# Altium PCB OLED-0.96-Demo-MCU+Board.PcbDoc (part 1 of 2)
Units mil, origin at the board's own origin, x right, y up, seen from the top; angles counter-clockwise.
Board outline 1090.03 x 3263.03 mil, 2 copper layers (Top Layer, Bottom Layer); 60 components, 61 nets, 262 pads, 120 vias.
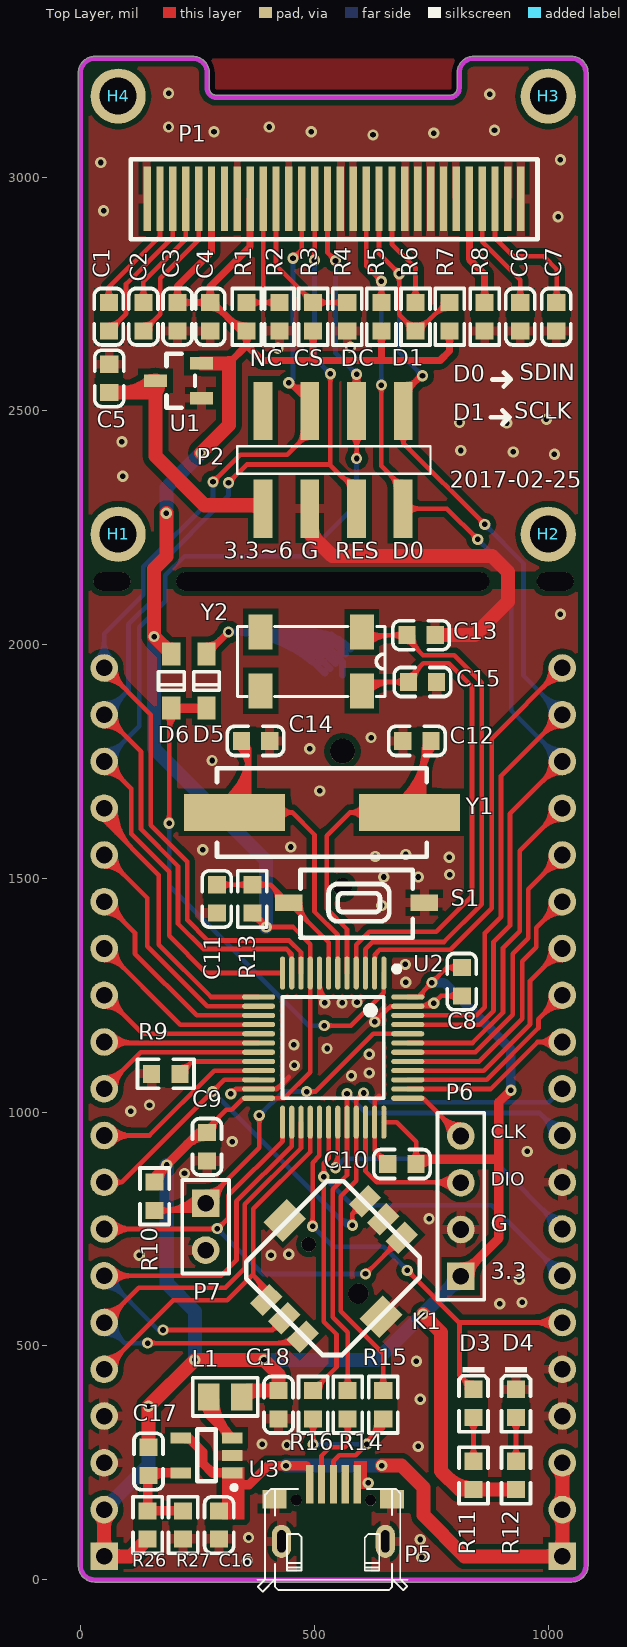
[diagram p0: Top Layer view]
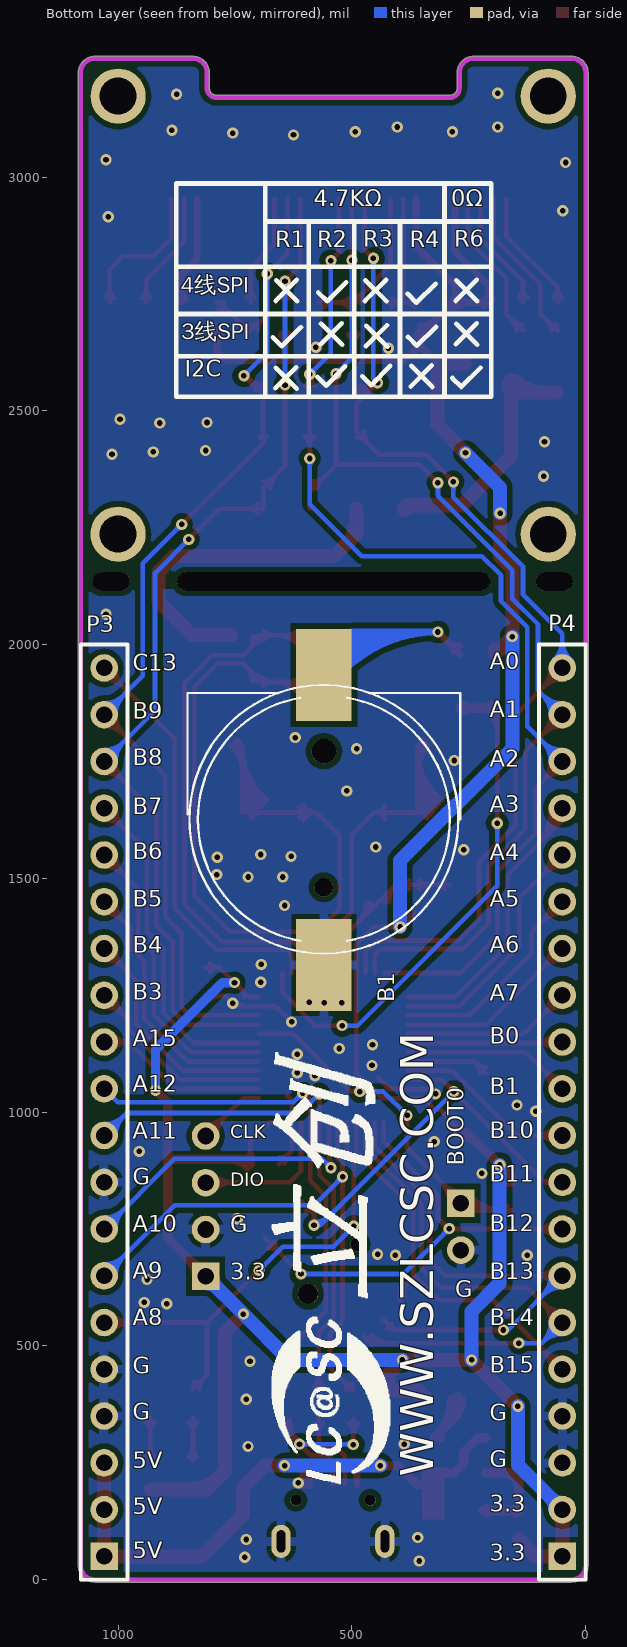
[diagram p1: Bottom Layer view, seen from below]
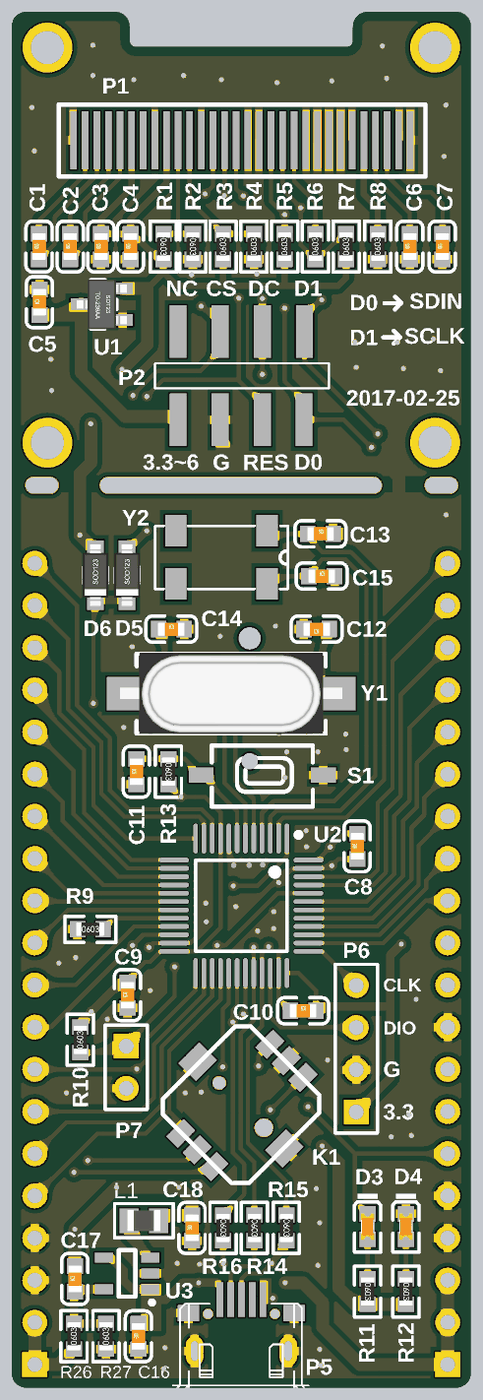
[diagram p3: 3D render of the assembled board from above, using the file's embedded part models]

## Layer stack, top to bottom
Top Solder: solder mask 0.4, Solder Resist, Dk 3.5
Top Layer: signal copper 1.4
Dielectric 1: dielectric 12.6, FR-4, Dk 4.8
Bottom Layer: signal copper 1.4
Bottom Solder: solder mask 0.4, Solder Resist, Dk 3.5

## Board outline
30,-5.02 cw(c30,30) -5.02,30 -5.02,3223 cw(c30,3223) 30,3258.01 240,3258.01 cw(c240,3223) 275.02,3223 275.02,3190 ccw(c290,3190) 290,3175.01 790,3175.01 ccw(c790,3190) 804.98,3190 804.98,3221.5 cw(c810,3221.5) 805.04,3222.25 cw(c810,3223) 804.98,3223 cw(c840,3223) 840,3258.01 1050,3258.01 cw(c1050,3223) 1085.02,3223 1085.02,30 cw(c1050,30) 1050,-5.02

## Design rules (kind name [scope] priority, off if disabled: settings)
Clearance Clearance_1 [InPolygon] p1: gap=12
Clearance [All] p2: gap=7
ComponentClearance [All] p1: gap=4 collisioncheckmode=3 verticalgap=4 showdistances=FALSE
DiffPairsRouting [All] p1: maxlimit=10 minlimit=10 mostfreqgap=10 toplayer_minwidth=10 toplayer_maxwidth=15 toplayer_prefwidth=15 bottomlayer_minwidth=10 bottomlayer_maxwidth=15 bottomlayer_prefwidth=15 maxuncoupledlength=500
HoleSize [All] p1: absolutevalues=TRUE maxlimit=500 minlimit=1 maxpercent=80.000 minpercent=20.000
HoleToHoleClearance [All] p1: gap=4 allowstackedmicrovias=TRUE
MinimumSolderMaskSliver [All] p1: minsoldermaskwidth=4
PolygonConnect PolygonConnect_1 [Isvia] p1: connectstyle=Direct reliefconductorwidth=10 reliefentries=4 polygonreliefangle="90 Angle" airgapwidth=10
PolygonConnect [All] p2: connectstyle=Relief reliefconductorwidth=20 reliefentries=4 polygonreliefangle="90 Angle" airgapwidth=10
RoutingVias [All] p1: holewidth=20 width=30 viastyle="Through Hole" minholewidth=10 minwidth=10 maxholewidth=28 maxwidth=50
SilkToSilkClearance [All] p1: silktosilkclearance=4
SilkToSolderMaskClearance [IsPad] p1: minsilkscreentomaskgap=0 clearancetoexposedcopper=TRUE
SolderMaskExpansion [All] p1: expansion=4
Width [All] p1: maxlimit=500 minlimit=10 preferedwidth=10 minimp=50.000000 maximp=50.000000 favimp=50.000000
22 further rules are at their usual default settings.

## Components (designator, comment, footprint, x,y, rotation, side; value= is the part's Value field where it differs from the comment)
B1 "BAT" "BATTERY SOCKET" 560,1625 r270 bottom
C1 "1μF" LC-0603_C 60.01,2701.2 r90 top
C2 "1μF" LC-0603_C 134.01,2701.2 r90 top
C3 "1μF" LC-0603_C 207.01,2701.2 r90 top
C4 "1μF" LC-0603_C 277.01,2701.2 r90 top
C5 "1μF" LC-0603_C 61.01,2569.2 r90 top
C6 "4.7μF" LC-0603_C 940.01,2701.2 r90 top
C7 "2.2μF" LC-0603_C 1017.01,2701.2 r90 top
C8 "0.1μF" LC-0603_C 815,1279 r90 top
C9 "0.1μF" LC-0603_C 270,926 r90 top
C10 "0.1μF" LC-0603_C 687,889 r0 top
C11 "0.1μF" LC-0603_C 291,1456 r90 top
C12 "20pF" LC-0603_C 719,1794 r180 top
C13 "6pF" LC-0603_C 728,2020 r0 top
C14 "20pF" LC-0603_C 374,1794 r0 top
C15 "6pF" LC-0603_C 731,1920 r0 top
C16 "10uF (106) 10% 10V" LC-0603_C 296,117 r90 top
C17 "22pF (220) 5% 50V" LC-0603_C 145,253 r90 top
C18 "10uF (106) 10% 10V" LC-0603_C 423,374 r90 top
D3 "POWER" LC-0603_LED_S1 840,377 r270 top
D4 "POWER" LC-0603_LED_S1 931,377 r270 top
D5 "MBR0520L" LC-SOD-123 269,1922 r90 top
D6 "MBR0520L" LC-SOD-123 194,1922 r90 top
H1 "Hole" Hole 80,2236 r0 top
H2 "Hole" Hole 1000.01,2236.2 r0 top
H3 "Hole" Hole 1000,3173 r180 top
H4 "Hole" Hole 80,3173 r180 top
K1 "KEY-5_MiNi" KEY_5_MINI 540,666 r45 top
L1 "2.2uH ±10%" LC-0805_L 309,391 r0 top
P1 "0.96OLED" OLED_0.96 142.01,2953.2 r180 top
P2 "Header 4X2" 2*4P_SMT 540.01,2395.2 r270 top
P3 "Header 20" HDR1X20 1030,50 r90 bottom
P4 "Header 20" HDR1X20 50,50 r90 bottom
P5 "Micro USB,母头" MicroUSB2 540,143 r0 top
P6 "下载接口" HDR1X4 813,649 r90 top
P7 "BOOT0" HDR1X2 267,805 r270 top
R1 "4.7KΩ/NC" LC-0603_R 355.01,2701.2 r270 top
R2 "4.7KΩ" LC-0603_R 425.01,2701.2 r270 top
R3 "4.7KΩ/NC" LC-0603_R 497.01,2701.2 r90 top
R4 "4.7KΩ" LC-0603_R 570.01,2701.2 r90 top
R5 "4.7KΩ" LC-0603_R 643.01,2701.2 r90 top
R6 "0Ω/NC" LC-0603_R 716.01,2701.2 r90 top
R7 "4.7KΩ" LC-0603_R 789.01,2701.2 r90 top
R8 "910KΩ" LC-0603_R 864.01,2701.2 r90 top
R9 "4.7KΩ" LC-0603_R 182,1082 r0 top
R10 "4.7KΩ" LC-0603_R 158,820 r90 top
R11 "1.5KΩ" LC-0603_R 840,223 r270 top
R12 "1.5KΩ" LC-0603_R 931,223 r270 top
R13 "4.7KΩ" LC-0603_R 367,1456 r270 top
R14 "100Ω" LC-0603_R 571,374 r270 top
R15 "100Ω" LC-0603_R 647,374 r270 top
R16 "1.5KΩ" LC-0603_R 497,374 r270 top
R26 "280KΩ (2803) ±1%" LC-0603_R 143,117 r90 top
R27 "62KΩ (6202) ±1%" LC-0603_R 219,117 r90 top
S1 "微动开关" 按键 590,1448 r180 top
U1 "SC662K-3.3" LC-SOT-23(SOT-23-3) 209.01,2564.2 r0 top
U2 "STM32F103C8T6" LC-LQFP-48_7x7x05P 540,1138 r180 top
U3 "BL8027" LC-SOT-23-5 269,266 r0 top
Y1 "8M" LC-HC-49SMD 516,1641 r180 top
Y2 "32768" MC-306 493,1964 r180 top

## Footprints (in the part's own frame and the unit in brackets; to place one, negate y for a bottom-side part, rotate by r counter-clockwise, add the part's x,y. Pads: shape width x height; smd on the part's side, far side on the other; paste and mask are expansions set on the pad)
2*4P_SMT [mm]
  rect 3.17x1.02 smd: 1(-2.654,3.81) 2(2.654,3.785) 3(-2.654,1.27) 4(2.654,1.27) 5(-2.654,-1.27) 6(2.654,-1.27) 7(-2.654,-3.81) 8(2.654,-3.81)
  silkscreen extent -0.74,-5.21 0.76,5.28
"BATTERY SOCKET" [mm]
  rect 5x3 smd: 1(-7.874,0) 2(7.874,0)
  round 1 hole 1 unplated: 3(3.664,0)
  round 1.35 hole 1.35 unplated: 4(-3.736,0)
  silkscreen extent -7.33,-7.41 7.26,7.41
HDR1X2 [mm] "Connector; Header; 2 Position"
  rect 1.5x1.5 hole 0.9: 1(0,0)
  round 1.5 hole 0.9: 2(2.54,0)
  silkscreen extent -1.27,-1.27 3.81,1.27
HDR1X4 [mm] "Connector; Header; 4 Position"
  rect 1.5x1.5 hole 0.9: 1(0,0)
  round 1.5 hole 0.9: 2(2.54,0) 3(5.08,0) 4(7.62,0)
  silkscreen extent -1.27,-1.27 8.89,1.27
HDR1X20 [mm] "Connector; Header; 20 Position"
  rect 1.5x1.5 hole 0.9: 1(0,0)
  round 1.5 hole 0.9: 2(2.54,0) 3(5.08,0) 4(7.62,0) 5(10.16,0) 6(12.7,0) 7(15.24,0) 8(17.78,0) 9(20.32,0) 10(22.86,0) 11(25.4,0) 12(27.94,0) 13(30.48,0) 14(33.02,0) 15(35.56,0) 16(38.1,0) 17(40.64,0) 18(43.18,0) 19(45.72,0) 20(48.26,0)
  silkscreen extent -1.27,-1.27 49.53,1.27
Hole [mm]
  round 3 hole 2: 0(0,0)
KEY_5_MINI [mm]
  rect 1.5x1 smd: 1(3.797,-1.461) 2(3.797,-0.038) 3(3.797,1.359) 4(-3.797,1.359) 5(-3.797,-0.038) 6(-3.797,-1.461)
  rect 1.8x1.5 smd: 7(-0.025,3.696) 8(-0.025,-3.696)
  round 0.8 hole 0.8: ""(-0.013,1.867)
  round 1.1 hole 1.1: ""(-0.013,-1.943)
  silkscreen extent -3.75,-3.67 3.75,3.59
LC-0603_C [mm]
  rect 0.93x0.98 smd: 1(-0.77,0) 2(0.77,0)
  silkscreen extent -1.53,-0.79 1.54,0.79, body extent -0.8,-0.4 0.8,0.4, height 0.3
LC-0603_LED_S1 [mm]
  rect 0.93x0.98 smd: A(0.77,0) K(-0.77,0)
  silkscreen extent -1.97,-0.79 1.54,0.79, body extent -0.8,-0.4 0.8,0.4, height 0.6
LC-0603_R [mm]
  rect 0.93x0.98 smd: 1(-0.77,0) 2(0.77,0)
  silkscreen extent -1.53,-0.79 1.54,0.79, body extent -0.85,-0.4 0.85,0.4, height 0.56
LC-0805_L [mm]
  rect 1.16x1.47 smd: 1(-0.89,0) 2(0.89,0)
  silkscreen extent -1.77,-1.04 1.77,1.03, body extent -1.02,-0.64 1.03,0.64, height 0.6
LC-HC-49SMD [mm]
  rect 5.5x2 smd: 1(-4.75,0) 2(4.75,0)
  silkscreen extent -5.7,-2.4 5.7,2.4, body extent -6.7,-2.46 6.7,2.44, height 4
LC-LQFP-48_7x7x05P [mm]
  oval 0.28x1.8 smd mask+0.051: 1(-2.75,-4.05) 2(-2.25,-4.05) 3(-1.75,-4.05) 4(-1.25,-4.05) 5(-0.75,-4.05) 6(-0.25,-4.05) 7(0.25,-4.05) 8(0.75,-4.05) 9(1.25,-4.05) 10(1.75,-4.05) 11(2.25,-4.05) 12(2.75,-4.05) 25(2.75,4.05) 26(2.25,4.05) 27(1.75,4.05) 28(1.25,4.05) 29(0.75,4.05) 30(0.25,4.05) 31(-0.25,4.05) 32(-0.75,4.05) 33(-1.25,4.05) 34(-1.75,4.05) 35(-2.25,4.05) 36(-2.75,4.05)
  oval 1.8x0.28 smd mask+0.051: 13(4.05,-2.75) 14(4.05,-2.25) 15(4.05,-1.75) 16(4.05,-1.25) 17(4.05,-0.75) 18(4.05,-0.25) 19(4.05,0.25) 20(4.05,0.75) 21(4.05,1.25) 22(4.05,1.75) 23(4.05,2.25) 24(4.05,2.75) 37(-4.05,2.75) 38(-4.05,2.25) 39(-4.05,1.75) 40(-4.05,1.25) 41(-4.05,0.75) 42(-4.05,0.25) 43(-4.05,-0.25) 44(-4.05,-0.75) 45(-4.05,-1.25) 46(-4.05,-1.75) 47(-4.05,-2.25) 48(-4.05,-2.75)
  silkscreen extent -3.6,-4.42 2.75,2.75
LC-SOD-123 [mm]
  rect 1.25x1 smd: 1(1.475,0) 2(-1.475,0)
  silkscreen extent -0.5,-0.7 0.5,0.7, body extent -1.85,-0.77 1.85,0.78, height 1.35
LC-SOT-23(SOT-23-3) [mm]
  rect 1.25x0.7 smd: 1(1.25,-0.95) 2(1.25,0.95) 3(-1.25,0)
  silkscreen extent -0.65,-1.46 0.9,1.46, body extent -1.5,-1.5 1.5,1.5, height 1.3
LC-SOT-23-5 [mm]
  rect 1.1x0.6 smd: 1(1.4,-0.95) 2(1.4,0) 3(1.4,0.95) 4(-1.4,0.95) 5(-1.4,-0.95)
  silkscreen extent -0.5,-1.87 1.63,1.4
MC-306 [mm]
  rect 1.3x1.9 smd: 1(-2.75,-1.6) 2(2.75,-1.6) 3(2.75,1.6) 4(-2.75,1.6)
  silkscreen extent -4,-1.9 4,1.9
MicroUSB2 [mm] "Connector; USB1.1, Type A, Thru-Hole; 4 Position; Vertical"
  rect 1.3x1 smd: 0(-3.188,0.737) 0(3.188,0.737)
  oval 1.05x1.8 hole 0.45 slot 1.2 at 90 deg: 0(-2.807,-1.549) 0(2.832,-1.549)
  rect 0.4x2.1 smd: 1(-1.283,1.549) 2(-0.635,1.549) 3(0.013,1.549) 4(0.66,1.549) 5(1.308,1.549)
  round 0.6 hole 0.6: ""(-2.007,0.686) ""(2.032,0.686)
  silkscreen extent -4.13,-4.28 4.05,1.3
OLED_0.96 [mm]
  rect 0.4x3.5 smd: 1(0,0) 2(-0.7,0) 3(-1.4,0) 4(-2.1,0) 5(-2.8,0) 6(-3.5,0) 7(-4.2,0) 8(-4.9,0) 9(-5.6,0) 10(-6.3,0) 11(-7,0) 12(-7.7,0) 13(-8.4,0) 14(-9.1,0) 15(-9.8,0) 16(-10.5,0) 17(-11.2,0) 18(-11.9,0) 19(-12.6,0) 20(-13.3,0) 21(-14,0) 22(-14.7,0) 23(-15.4,0) 24(-16.1,0) 25(-16.8,0) 26(-17.5,0) 27(-18.2,0) 28(-18.9,0) 29(-19.6,0) 30(-20.3,0)
  silkscreen extent -21.21,-2.16 0.89,2.18
按键 [mm]
  rect 1.5x0.9 smd: 1(-3.683,0) 2(3.683,0)
  silkscreen extent -3.05,-1.78 3.05,1.91

## Part data
B1: "电池"
C1 C2 C3 C4 C5 C6 C7 C8 C9 C10 C11 C12 C13 C14 C15: library part Cap, "贴片电容"
C16 C18: library part "0603 10uF (106) 10% 10V", "贴片电容"
C17: library part "0402 22pF (220) 5% 50V", "贴片电容"
D3 D4: library part LED1, "发光二极管"
D5 D6: library part "Diode 18TQ045", "贴片肖特基二极管"
H1 H2 H3 H4: "螺丝孔"
K1: "贴片五向开关"
L1: library part "0805 2.2uH 10%", "贴片电感"
P1: "接口"
P2: "Header, 4-Pin, Dual row"
P3 P4: "Header, 20-Pin"
P5: library part microUSB, "接口"
P6: library part "Header 4", "Header, 4-Pin"
P7: library part "Header 2", "Header, 2-Pin"
R1 R2 R3 R4 R5 R6 R7 R8 R9 R10 R11 R12 R13 R14 R15 R16: library part 电阻, "贴片电阻"
R26 R27: library part "0805 62KΩ (6202) 1%", "贴片电阻"
U1: "IC"
U2: library part STM32F103CBT6, "IC"
U3: library part DC-DC, "IC"
Y1 Y2: library part XTAL_1, "晶振（直插）"

## Free pads (board coordinates)
  oval 78.74x39.37 hole 39.37 slot 78.74 at 0 deg paste+0: 0(67,2135) 0(1015,2135)
  oval 669.29x39.37 hole 39.37 slot 669.29 at 0 deg paste+0: 0(539,2135)

## Via types
v1: diameter 24, hole 12, Top Layer to Bottom Layer, tented both sides, 120 vias

## Nets (pads, with @x,y where several pads share a name; then routed paths per layer and width w, separated by ;. In a path a pad name is that pad's centre, name@x,y a point inside that pad or via, vN(x,y) a via of type N, cw(c..) or ccw(c..) an arc to the next point about the centre after c; other vN are vias at no path point)
+3.3V: C3.2 C4.2 C8.2 C9.2 C10.2 C17.2 C18.2 D6.1 L1.2 P1.6 P1.9 P4.1 P4.2 P6.1 R1.2 R3.1 R5.1 R7.1 R10.2 R11.2 R12.2 R13.2 R26.1 U1.2 U2.9 U2.24 U2.36 U2.48 | length 8821.9
  Top Layer w10: C9.2@270,956.31 270,964 311,1005 323,1005 347.73,1029.73 U2.24@380.55,1029.73 434.73,1029.73 490.79,1085.79 U2.9@490.79,1297.45 490.79,1359.21 454,1396 v1(396.68,1396) R13.2@367,1425.68 ; C9.2@270.98,969.62 ccw(c270.98,980.82) C9.2@278.9,972.9 ; C9.2@274.29,956.31 cw(c303.2,956.31) 282.76,976.76 ; C9.2@284.29,956.31 cw(c337.35,956.31) 299.83,993.83 ; R13.2@367.98,1412.38 cw(c367.98,1382.63) v1@389.02,1403.66 ; R13.2@377.59,1410.27 cw(c364.35,1387.34) v1@389.92,1394.19 ; R13.2@381.29,1425.68 ccw(c415.79,1425.68) v1@391.4,1401.29 ; R13.2@384.22,1413.71 ccw(c404.58,1425.47) v1@398.5,1402.76 ; 388.9,1405.62 cw(c379.98,1400.48) v1@389.92,1397.81 ; v1@389.68,1396 ccw(c372.79,1396) 384.74,1407.95 ccw(c396.68,1419.9) v1@396.68,1403 ; v1@401.63,1391.05 cw(c413.58,1379.1) 413.58,1396 cw(c413.58,1412.9) v1@401.63,1400.95 ; U2.36@648.27,978.55 675.45,978.55 717.31,936.69 C10.2@717.31,889 ; U2.48@699.45,1246.27 720.27,1246.27 v1(751,1277) 783.31,1309.31 ; C10.2@707.91,899.39 ccw(c685.19,922.11) 717.31,922.11 ccw(c749.44,922.11) C10.2@726.72,899.39 ; U2.48@729.88,1246.27 cw(c753.09,1246.27) 736.68,1262.68 ; v1@744,1277 cw(c727.1,1277) 739.05,1265.05 cw(c751,1253.1) v1@751,1270 ; v1@751,1284 ccw(c751,1300.9) 762.95,1288.95 ccw(c774.9,1277) v1@758,1277 ; C8.2@804.3,1300.22 ccw(c783.32,1280.56) 783.32,1309.31 ; C8.2@804.3,1318.41 cw(c783.32,1338.07) 783.32,1309.31 ; C8.2@815,1309.31 783.31,1309.31
  Top Layer w15: C3.2@199.37,2739.16 ccw(c180.92,2757.61) 207.01,2757.61 ccw(c233.1,2757.61) C3.2@214.66,2739.16 ; C3.2@215.64,2723.87 cw(c234.09,2705.42) 234.09,2731.52 cw(c234.09,2757.61) C3.2@215.64,2739.16 ; U1.2@252.01,2602.2 U1.2@258.23,2602.2 ; C4.2@268.39,2723.87 ccw(c249.94,2705.42) 249.94,2731.52 ccw(c249.94,2757.61) C4.2@268.39,2739.16 ; C4.2@269.37,2739.16 ccw(c250.92,2757.61) 277.01,2757.61 ccw(c303.1,2757.61) C4.2@284.66,2739.16 ; C4.2@278,2720.71 cw(c278,2683.27) 304.47,2709.74 ; P1.6@279.81,2953.2 279.81,2840 207.01,2767.2 C3.2@207.01,2731.52 C4.2@277.01,2731.52 ; C4.2@288.81,2731.52 ccw(c303.55,2731.52) C4.2@293.12,2721.09 ; 317.01,2602.2 355.01,2640.2 ; 317.31,2696.9 ccw(c354.03,2733.62) R1.2@354.03,2681.69 ; R1.2@347.37,2663.24 cw(c328.92,2644.79) 355.01,2644.79 cw(c381.1,2644.79) R1.2@362.66,2663.24 ; P1.9@362.49,2953.2 362.49,2851.67 277.01,2766.2 C4.2@277.01,2731.52 ; R3.1@489.37,2663.24 cw(c470.92,2644.79) 497.01,2644.79 cw(c523.1,2644.79) R3.1@504.66,2663.24 ; R3.1@497.01,2670.89 497.01,2609.01 496,2608 ; R5.1@635.37,2663.24 cw(c616.92,2644.79) 643.01,2644.79 cw(c669.1,2644.79) R5.1@650.66,2663.24 ; R5.1@643.01,2670.89 643.01,2608.99 644,2608 ; R7.1@781.37,2663.24 cw(c762.92,2644.79) 789.01,2644.79 cw(c815.1,2644.79) R7.1@796.66,2663.24 ; R7.1@789.01,2670.89 789.01,2628.01 769,2608 644,2608 ; C4.2@277.01,2731.52 282.7,2731.52 343.33,2670.88 R1.2@355.01,2670.88 355.01,2640.2 ; 355.01,2640.2 387.21,2608 496,2608 ; 496,2608 644,2608
  Top Layer w20: R10.2@158,850.32 158,861 v1(184,887) 253.31,956.31 C9.2@270,956.31 ; R10.2@167.29,850.32 cw(c215.52,850.32) v1@181.42,884.42 ; 228.03,931.03 cw(c269.02,890.05) C9.2@269.02,948.01 ; C10.2@717.31,889 727.31,899 894,899 ; C10.2@723.19,884.11 cw(c759.14,848.16) 759.14,899 ; P6.1@813,649 894,730 894,899 ; P6.1@813,668.53 ccw(c813,715.67) 846.34,682.34 ccw(c879.67,649) P6.1@832.53,649 ; v1(920,1047) 894,1021 894,899
  Top Layer w30: P4.1@39.73,60.27 ccw(c14.93,85.07) 50,85.07 ccw(c85.07,85.07) 60.27,60.27 ccw(c85.07,85.07) 85.07,50 ccw(c85.07,14.93) P4.1@60.27,39.73 ; P4.2@39.73,139.73 cw(c14.93,114.93) 50,114.93 cw(c85.07,114.93) P4.2@60.27,139.73 ; P4.2@50,150 P4.1@50,50 106.31,50 R26.1@143,86.69 ; C17.2@145,283.31 v1(145,371) v1(244,470) v1(392,470) 423,439 C18.2@423,404.31 357.35,404.31 L1.2@344.04,391 ; D6.1@177.6,1996.47 ccw(c194,2012.87) D6.1@194,1989.68 ; v1(183,2281) 183,2188 157,2162 v1(157,2017.07) D6.1@194,1980.07 ; v1(257,2410) 317.01,2470.01 317.01,2602.2 316.42,2601.6 U1.2@258.23,2601.6 ; L1.2@349.58,391.56 cw(c380.37,360.78) 380.37,404.31 ; v1(732,568) 771,529 771,232 810.32,192.68 R11.2@840,192.68 R12.2@931,192.68 ; 784.38,218.62 ccw(c839.02,273.27) R11.2@839.02,195.99
  Bottom Layer w20: v1(751,1277) 776.8,1277 920,1133.8 v1(920,1047)
  Bottom Layer w30: P4.2@50,150 145,245 v1(145,371) ; P4.2@50,164.53 ccw(c50,199.6) 74.8,174.8 ccw(c99.6,150) P4.2@64.53,150 ; v1(157,2017.07) 157,1778 396.68,1538.32 v1(396.68,1396) ; v1(183,2281) 183,2336 v1(257,2410) ; v1(184,887) 184,634 244,574 v1(244,470) ; v1(392,470) 634,470 v1(732,568) P6.1@813,649 ; P6.1@798.47,649 cw(c763.4,649) 788.2,624.2 cw(c813,599.4) P6.1@813,634.47
+3.3~6V: C5.1 P2.8 U1.3 | length 717.2
  Top Layer w30: C5.1@61.01,2538.89 158.92,2538.89 ; 90.81,2538.89 ccw(c90.81,2622.37) U1.3@149.84,2563.34 ; U1.3@158.88,2565 ccw(c173.79,2551.99) 159.8,2538 ; U1.3@159.8,2564.2 159.8,2539.77 ; U1.3@160.73,2565 cw(c146.69,2552.88) 159.8,2539.77 ; U1.3@160.78,2564.93 cw(c144.82,2552.98) 158.92,2538.89 ; 360.13,2298 cw(c360.13,2260.82) P2.8@386.42,2287.11 ; P2.8@390.01,2290.7 382.71,2298 265,2298 159.8,2403.2 159.8,2538 ; 158.92,2538.89 159.8,2539.77 ; 158.92,2538.89 159.8,2538
+5V: C16.2 P3.1 P3.2 P3.3 P5.1 U3.1 U3.4 | length 1578.7
  Top Layer w15: P5.1@483,243 489.5,236.5 P5.1@489.5,204
  Top Layer w20: U3.4@213.88,303.4 230.6,303.4 261,273 261,249 282,228 282.6,228.6 U3.1@324.12,228.6 ; U3.4@223.72,301.59 cw(c223.72,280.62) 238.55,295.45 ; 317,203 360,203 401,244 v1(439,244) 482,244 P5.1@483,243
  Top Layer w30: v1(644,244) 686,244 733,197 733,138 821,50 P3.1@1030,50 P3.2@1030,150 P3.3@1030,250 ; P3.1@1019.73,39.73 ccw(c994.93,14.93) 994.93,50 ccw(c994.93,85.07) 1019.73,60.27 ccw(c994.93,85.07) 1030,85.07 ccw(c1065.07,85.07) P3.1@1040.27,60.27 ; P3.2@1019.73,139.73 cw(c994.93,114.93) 1030,114.93 cw(c1065.07,114.93) P3.2@1040.27,139.73 ; P3.2@1019.73,160.27 ccw(c994.93,185.07) 1030,185.07 ccw(c1065.07,185.07) P3.2@1040.27,160.27 ; P3.3@1019.73,239.73 cw(c994.93,214.93) 1030,214.93 cw(c1065.07,214.93) P3.3@1040.27,239.73
  Bottom Layer w30: v1(439,244) v1(644,244)
BOOT0: P7.1 R10.1 U2.44 | length 1229.5
  Top Layer w10: R10.1@158,789.69 247.69,789.69 P7.1@263,805 ; R10.1@168.39,780.28 cw(c191.11,757.56) 191.11,789.69 cw(c191.11,821.81) R10.1@168.39,799.09 ; R10.1@170.81,789.69 ccw(c170.81,901.19) P7.1@249.66,822.34 ; 194.95,789.69 ccw(c194.95,877.05) P7.1@256.73,815.27 ; 219.1,789.69 ccw(c219.1,852.9) P7.1@263.8,808.2 ; P7.1@262.69,804.69 P7.1@263,805 ; P7.1@267,829.53 ccw(c267,879.09) 302.04,844.04 ; P7.1@281.53,805 cw(c326.26,805) 294.63,836.63 ; P7.1@291.53,805 cw(c360.4,805) 311.7,853.7 ; v1@377.05,988.05 cw(c365.1,976.1) 382,976.1 cw(c398.9,976.1) v1@386.95,988.05 ; v1(382,993) 382,924 P7.1@263,805 ; v1(483,1044) 502,1044 625.53,1167.53 U2.44@699.45,1167.53 ; v1@487.95,1039.05 cw(c499.9,1027.1) 499.9,1044 cw(c499.9,1060.9) v1@487.95,1048.95
  Bottom Layer w10: v1(382,993) 433,1044 v1(483,1044) ; v1@382,1000 ccw(c382,1016.9) 393.95,1004.95 ccw(c405.9,993) v1@389,993 ; v1@478.05,1039.05 ccw(c466.1,1027.1) 466.1,1044 ccw(c466.1,1060.9) v1@478.05,1048.95
DGND: B1.2 C3.1 C4.1 C5.2 C6.1 C7.1 C8.1 C9.1 C10.1 C11.1 C12.2 C13.2 C14.2 C15.2 C16.1 C18.1 D4.K K1.2 K1.7 K1.8 P1.1 P1.8 P1.12 P1.16 P1.17 P1.21 P1.22 P1.23 P1.24 P1.25 P1.29 P1.30 P2.6 P3.4 P3.5 P3.9 P4.3 P4.4 P5.0 P5.5 P6.2 P7.2 R2.2 R4.1 R8.1 R9.1 R27.1 S1.1 U1.1 U2.8 U2.23 U2.35 U2.47 U3.2 | length 1701.5
  Top Layer w10: v1(321,1039) 331.42,1049.42 ; v1@321.71,1045.96 ccw(c322.93,1057.9) 331.42,1049.42 ; v1@327.96,1039.71 cw(c339.9,1040.93) 331.42,1049.42 ; U2.23@410.47,1049.93 ccw(c410.47,1072.76) 426.62,1056.62 ; 445,1075 419.42,1049.42 U2.23@380.55,1049.42 331.42,1049.42 ; 510.47,1254.59 ccw(c542.59,1254.59) v1@519.88,1231.88 ; U2.8@510.47,1278.73 ccw(c566.73,1278.73) v1@526.95,1238.95 ; U2.8@510.47,1297.45 510.47,1245.53 ; v1@515,1234.18 ccw(c499.53,1234.58) 510.47,1245.53 ; v1@521.82,1241 cw(c521.42,1256.47) 510.47,1245.53 ; v1(522,1234) 510.47,1245.53 ; v1(629,1193) 662.58,1226.58 U2.47@699.45,1226.58 748.58,1226.58 770.69,1248.69 C8.1@815,1248.69 ; v1@629,1200 ccw(c629,1216.9) 640.95,1204.95 ccw(c652.9,1193) v1@636,1193 ; 632.29,913.4 ccw(c656.69,937.79) C10.1@656.69,903.29 ; 634.66,911.02 cw(c613.63,889.98) C10.1@643.38,889.98 ; 638,1035 628.58,1025.58 U2.35@628.58,978.55 628.58,917.1 C10.1@656.69,889 ; 656.8,1220.8 cw(c669.53,1208.07) U2.47@669.53,1226.07 ; U2.47@722.61,1226.58 ccw(c722.61,1265.39) v1@750.05,1237.95 ; v1@755,1240 ccw(c755,1256.9) 766.95,1244.95 ccw(c778.9,1233) v1@762,1233 ; C8.1@804.61,1239.28 ccw(c781.89,1216.56) 781.89,1248.69 ccw(c781.89,1280.81) C8.1@804.61,1258.09
  Top Layer w30: P2.6@490.01,2290.7 490.01,2236.99 538,2189 880,2189 914,2155 914,2092 842,2020 C13.2@758.31,2020 ; P2.6@495.09,2248.38 ccw(c534.86,2248.38) 506.74,2220.26
  other v1: 356,40 729,48 726,86 359,90 615,207 722,285 441,288 388,290 726,386 718,467 896,590 944,593 938,642 125,694 407,694 445,696 745,772 222,869 955,916 324,937 107,1002 147,1015 579,1078 617,1084 457,1100 617,1124 527,1136 456,1144 755,1233 559,1234 591,1235 695,1278 694,1316 644,1442 648,1503 722,1503 789,1508 788,1545 630,1547 695,1551 261,1561 449,1567 511,1687 281,1752 490,1777 621,1801 1026,2065 90,2360 1013,2407 925,2412 813,2415 88,2434 911,2474 810,2475 996,2482 422,2634 577,2636 1021,2915 49,2928 43,3031 1026,3037 625,3090 755,3094 285,3097 493,3097 885,3100 188,3107 403,3107 875,3177 188,3179
NetB1_1: B1.1 D5.1 | length 1516.9
  Top Layer w15: D5.1@269,1980.07 315.93,2027 v1(316,2027) ; D5.1@269,1997.18 ccw(c269,2038.48) 298.2,2009.27 ; D5.1@281.18,1984.99 cw(c298.72,1984.99) D5.1@286.32,1997.39
  Bottom Layer w15: 351.14,2027 cw(c351.14,1774.4) B1.1@533.6,1949.09 ; 386.27,2027 cw(c386.27,1808.04) B1.1@544.43,1959.46 ; 421.4,2027 cw(c421.4,1841.67) B1.1@555.27,1969.84 ; 456.52,2027 cw(c456.52,1875.3) B1.1@566.1,1980.21 ; 491.65,2027 cw(c491.65,1908.93) B1.1@576.93,1990.58 ; B1.1@509.33,1983.89 ccw(c461.82,1992.81) 496,2027 ; B1.1@510.68,2012.32 ccw(c530.79,2032.43) B1.1@543.57,2007.03 ; B1.1@522.76,1938.72 ccw(c316.01,1740.77) v1(316,2027) 496,2027 ; B1.1@536.83,2020.42 cw(c520.96,2051.96) 496,2027 ; B1.1@560,1935 560,1963 496,2027
NetC1_1: C1.1 P1.3 | length 389.6
  Top Layer w10: C1.1@60.01,2670.89 97.01,2707.89 97.01,2771.2 197.13,2871.32 P1.3@197.13,2953.2 ; C1.1@61,2684.19 ccw(c61,2713.94) 82.03,2692.91 ; C1.1@74.31,2670.89 cw(c108.81,2670.89) 84.41,2695.28
NetC1_2: C1.2 P1.2 | length 317.5
  Top Layer w10: C1.2@50.6,2740.92 ccw(c27.89,2763.64) 60.01,2763.64 ccw(c92.14,2763.64) C1.2@69.42,2740.92 ; C1.2@60.01,2731.52 60.01,2764.2 169.57,2873.76 P1.2@169.57,2953.2
NetC2_1: C2.1 P1.5 | length 381.8
  Top Layer w10: C2.1@134.01,2670.89 170.01,2706.89 170.01,2783.2 252.25,2865.44 P1.5@252.25,2953.2 ; C2.1@135,2684.19 ccw(c135,2713.94) 156.03,2692.91 ; C2.1@148.31,2670.89 cw(c182.81,2670.89) 158.41,2695.28
NetC2_2: C2.2 P1.4 | length 309.7
  Top Layer w10: C2.2@124.6,2740.92 ccw(c101.89,2763.64) 134.01,2763.64 ccw(c166.14,2763.64) C2.2@143.42,2740.92 ; C2.2@134.01,2731.52 134.01,2776.2 224.69,2866.88 P1.4@224.69,2953.2
NetC6_2: C6.2 P1.27 | length 305.9
  Top Layer w10: P1.27@858.55,2953.2 858.55,2861.66 940.01,2780.2 C6.2@940.01,2731.52 ; C6.2@930.6,2740.92 ccw(c907.89,2763.64) 940.01,2763.64 ccw(c972.14,2763.64) C6.2@949.42,2740.92
NetC7_2: C7.2 P1.28 | length 365.3
  Top Layer w10: P1.28@886.11,2953.2 886.11,2869.11 925.01,2830.2 990.01,2830.2 1018.01,2802.2 1018.01,2732.51 C7.2@1017.01,2731.52 ; C7.2@1008.59,2740.92 ccw(c985.83,2763.68) 1018.01,2763.68 ; 1018.01,2763.6 ccw(c1050.09,2763.6) C7.2@1027.41,2740.92
NetC17_1: C17.1 R26.2 R27.2 U3.5 | length 368.1
  Top Layer w20: R26.2@137.13,153.19 ccw(c122.94,167.37) 143,167.37 ccw(c163.06,167.37) R26.2@148.87,153.19 ; 143,200.18 cw(c166.52,200.18) C17.1@149.89,216.81 ; R26.2@149.86,141.44 cw(c164.04,127.26) 164.04,147.32 cw(c164.04,167.37) R26.2@149.86,153.19 ; C17.1@151.86,216.81 cw(c180.32,188.35) 180.32,228.6 ; R27.2@212.14,141.44 ccw(c197.96,127.26) 197.96,147.32 ccw(c197.96,167.37) R27.2@212.14,153.19 ; U3.5@213.88,228.6 150.91,228.6 C17.1@145,222.69 143,220.69 R26.2@143,147.32 R27.2@219,147.32
NetD3_A: D3.A R11.1 | length 194.3
  Top Layer w10: R11.1@830.59,262.72 ccw(c807.87,285.44) 840,285.44 ccw(c872.13,285.44) R11.1@849.41,262.72 ; D3.A@830.59,337.28 cw(c807.87,314.56) 840,314.56 cw(c872.13,314.56) D3.A@849.41,337.28 ; R11.1@840,253.31 D3.A@840,346.68
NetD4_A: D4.A R12.1 | length 194.3
  Top Layer w10: R12.1@921.59,262.72 ccw(c898.87,285.44) 931,285.44 ccw(c963.13,285.44) R12.1@940.41,262.72 ; D4.A@921.59,337.28 cw(c898.87,314.56) 931,314.56 cw(c963.13,314.56) D4.A@940.41,337.28 ; R12.1@931,253.31 D4.A@931,346.68
NetL1_1: L1.1 U3.3 | length 308.7
  Top Layer w20: L1.1@264.89,375.82 cw(c242.98,353.91) 273.96,353.91 cw(c304.95,353.91) L1.1@283.04,375.82 ; L1.1@266.8,384.9 ccw(c325.15,384.9) 283.89,343.63 ; L1.1@273.96,391 273.96,353.56 U3.3@324.12,303.4 ; L1.1@286.8,384.9 ccw(c393.44,384.9) U3.3@318.03,309.49 ; 304.22,323.3 cw(c284.33,303.4) U3.3@312.46,303.4
NetP1_10: P1.10 R1.1 R2.1 | length 392.6
  Top Layer w10: R1.1@355.01,2731.51 390.01,2731.51 R2.1@425.01,2731.51 ; R1.1@365.41,2722.11 cw(c388.12,2699.39) 388.12,2731.51 cw(c388.12,2763.64) R1.1@365.41,2740.92 ; 390.05,2731.55 P1.10@390.05,2953.2 ; R2.1@414.62,2722.11 ccw(c391.9,2699.39) 391.9,2731.51 ccw(c391.9,2763.64) R2.1@414.62,2740.92
NetP1_11: P1.11 R3.2 R4.2 | length 479
  Top Layer w10: P1.11@417.6,2953.2 417.6,2810.92 R3.2@497.01,2731.52 R4.2@570.01,2731.52 ; 472.62,2755.91 cw(c448.22,2731.52) R3.2@482.72,2731.52 ; 474.99,2753.54 ccw(c496.03,2774.57) R3.2@496.03,2744.82 ; R3.2@507.41,2722.11 cw(c530.12,2699.39) 530.12,2731.52 cw(c530.12,2763.64) R3.2@507.41,2740.92 ; R4.2@559.62,2722.11 ccw(c536.9,2699.39) 536.9,2731.52 ccw(c536.9,2763.64) R4.2@559.62,2740.92
NetP1_20: P1.20 R6.2 | length 293
  Top Layer w10: P1.20@665.64,2953.2 665.64,2856.58 716.01,2806.2 R6.2@716.01,2731.52 ; R6.2@706.6,2740.92 ccw(c683.89,2763.64) 716.01,2763.64 ccw(c748.14,2763.64) R6.2@725.42,2740.92
NetP1_26: P1.26 R8.2 | length 276.3
  Top Layer w15: P1.26@830.99,2953.2 830.99,2824.22 864.01,2791.2 R8.2@864.01,2731.52 ; R8.2@856.37,2739.16 ccw(c837.92,2757.61) 864.01,2757.61 ccw(c890.1,2757.61) R8.2@871.66,2739.16
NetP5_2: P5.2 R14.2 | length 232.1
  Top Layer w10: P5.2@515,204 515,265 533,283 565,283 571,289 R14.2@571,343.68 ; R14.2@561.59,334.28 cw(c538.87,311.56) 571,311.56 cw(c603.13,311.56) R14.2@580.41,334.28
NetP5_3: P5.3 R15.2 R16.2 | length 724.2
  Top Layer w10: R16.2@487.59,334.28 cw(c464.87,311.56) 497,311.56 cw(c529.13,311.56) R16.2@506.41,334.28 ; v1@492.05,293.95 ccw(c480.1,305.9) 497,305.9 ccw(c513.9,305.9) v1@501.95,293.95 ; v1(497,289) R16.2@497,343.68 ; P5.3@540.5,204 540.5,253.5 553,266 588,266 v1(612,290) ; v1@605,290 cw(c588.1,290) 600.05,278.05 cw(c612,266.1) v1@612,283 ; v1@610.19,296.76 ccw(c605.81,313.09) 620.45,304.64 ccw(c635.08,296.19) v1@618.76,291.81 ; v1@612,297 ccw(c612,313.9) 623.95,301.95 ccw(c635.9,290) v1@619,290 ; 628.11,306.11 ccw(c592.77,341.46) R15.2@642.71,343.55 ; R15.2@632.72,343.13 cw(c561.83,340.17) v1(612,290) ; R15.2@642.65,331.11 cw(c640.54,325) 647,325 ; 644.23,322.23 ccw(c623.7,342.75) R15.2@652.7,343.96 ; R15.2@647,343.68 647,325 ; R15.2@651.35,331.11 ccw(c653.46,325) 647,325 ; v1(612,290) 647,325
  Bottom Layer w10: v1(497,289) 498,290 v1(612,290) ; v1@501.95,284.05 cw(c516.31,269.69) 516.31,290 ; v1@501.95,293.95 ccw(c511.49,303.49) 511.49,290 ; v1@607.05,285.05 ccw(c595.1,273.1) 595.1,290 ccw(c595.1,306.9) v1@607.05,294.95
NRST: C11.2 R13.1 S1.2 U2.7 | length 647.2
  Top Layer w10: C11.2@291,1486.31 R13.1@367,1486.31 406.69,1486.31 ; C11.2@301.39,1476.91 cw(c324.11,1454.19) 324.11,1486.31 cw(c324.11,1518.44) C11.2@301.39,1495.72 ; R13.1@356.61,1476.91 ccw(c333.89,1454.19) 333.89,1486.31 ccw(c333.89,1518.44) R13.1@356.61,1495.72 ; R13.1@377.39,1476.91 cw(c400.11,1454.19) 400.11,1486.31 cw(c400.11,1518.44) R13.1@377.39,1495.72 ; S1.2@420.51,1448.97 ccw(c372.98,1452.61) 406.69,1486.31 ; 422.07,1470.93 cw(c401.56,1450.42) S1.2@430.48,1448.21 ; S1.2@459.53,1448 ccw(c494.6,1448) 469.8,1423.2 ; S1.2@469.53,1448 ccw(c528.74,1448) 486.87,1406.13 ; U2.7@530.16,1297.45 530.16,1362.84 S1.2@445,1448 406.69,1486.31
OLED_CS: P1.13 P2.5 P4.20 U2.10 | length 2855.2
  Top Layer w10: P4.20@50,1925.47 cw(c50,1866.26) 91.87,1908.13 cw(c133.74,1950) P4.20@74.53,1950 ; P4.20@50,1935.47 cw(c50,1900.4) 74.8,1925.2 cw(c99.6,1950) P4.20@64.53,1950 ; P4.20@50,1950 150,1850 150,1614 228,1536 228,1411 272,1367 446.04,1367 471.1,1341.94 U2.10@471.1,1297.45 ; v1(283,2348) 341,2406 442,2406 490.01,2454.01 P2.5@490.01,2499.7 490.01,2514.99 v1(445,2560) ccw(c466.94,2581.94) P2.5@482.47,2555.08 ; v1@283,2355 ccw(c283,2371.9) 294.95,2359.95 ccw(c306.9,2348) v1@290,2348 ; v1@445,2553 cw(c445,2536.1) 456.95,2548.05 cw(c468.9,2560) v1@452,2560 ; v1@447.06,2553.31 cw(c451.45,2539.04) 458.91,2551.97 cw(c466.37,2564.89) v1@451.82,2561.56 ; v1@451.76,2561.81 ccw(c479.2,2569.16) 465,2544.56 ; v1@451.87,2558.66 ccw(c460.08,2557.06) 455.9,2549.82 ; v1(454.01,2826.2) 472.72,2844.91 P1.13@472.72,2953.2 ; v1@454.01,2833.2 ccw(c454.01,2850.1) 465.96,2838.15 ccw(c477.91,2826.2) v1@461.01,2826.2 ; 454.21,2550.79 ccw(c473.69,2570.27) P2.5@487.47,2546.42 ; 461.9,2425.9 ccw(c430.41,2457.38) P2.5@474.94,2457.38 ; 463.42,2541.58 ccw(c480.43,2558.59) P2.5@492.48,2537.76 ; 470.01,2434.01 cw(c490.01,2414.01) P2.5@490.01,2442.3
  Bottom Layer w10: P4.20@32.66,1967.34 ccw(c-9.21,2009.21) 50,2009.21 ccw(c109.21,2009.21) P4.20@67.34,1967.34 ; P4.20@39.73,1960.27 ccw(c14.93,1985.07) 50,1985.07 ccw(c85.07,1985.07) P4.20@60.27,1960.27 ; P4.20@50,1950 50,2023 134,2107 134,2166 283,2315 v1(283,2348) ; v1@278.05,2343.05 cw(c266.1,2331.1) 283,2331.1 cw(c299.9,2331.1) v1@287.95,2343.05 ; v1(445,2560) 454.01,2569.01 v1(454.01,2826.2) ; v1@449.06,2821.25 cw(c437.11,2809.3) 454.01,2809.3 cw(c470.91,2809.3) v1@458.96,2821.25